# Altium PCB PCB_上底板.pcbdoc
Units mil, origin at the board's own origin, x right, y up, seen from the top; angles counter-clockwise.
Board outline 3872.5 x 2860 mil, 2 copper layers (Top Layer, Bottom Layer); 3 components, 88 nets, 97 pads, 0 vias.
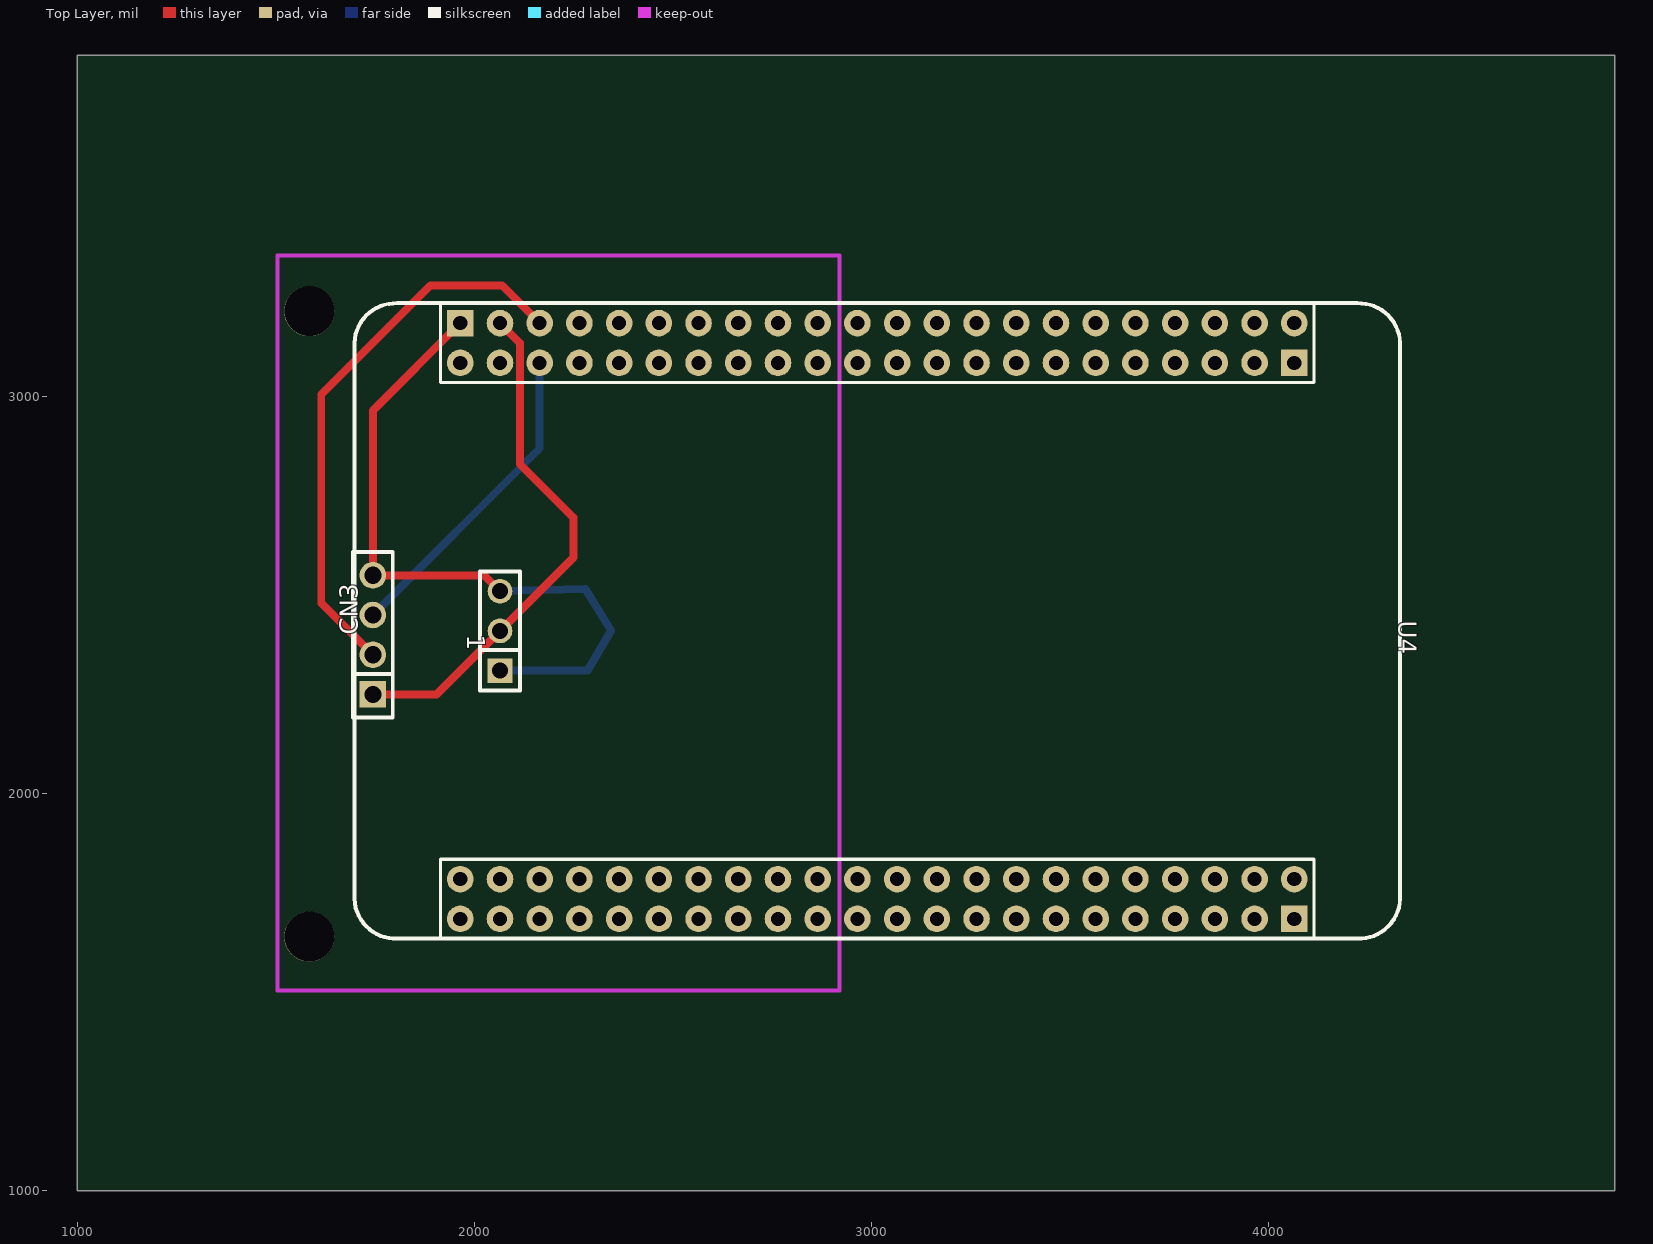
[diagram p0: Top Layer view]
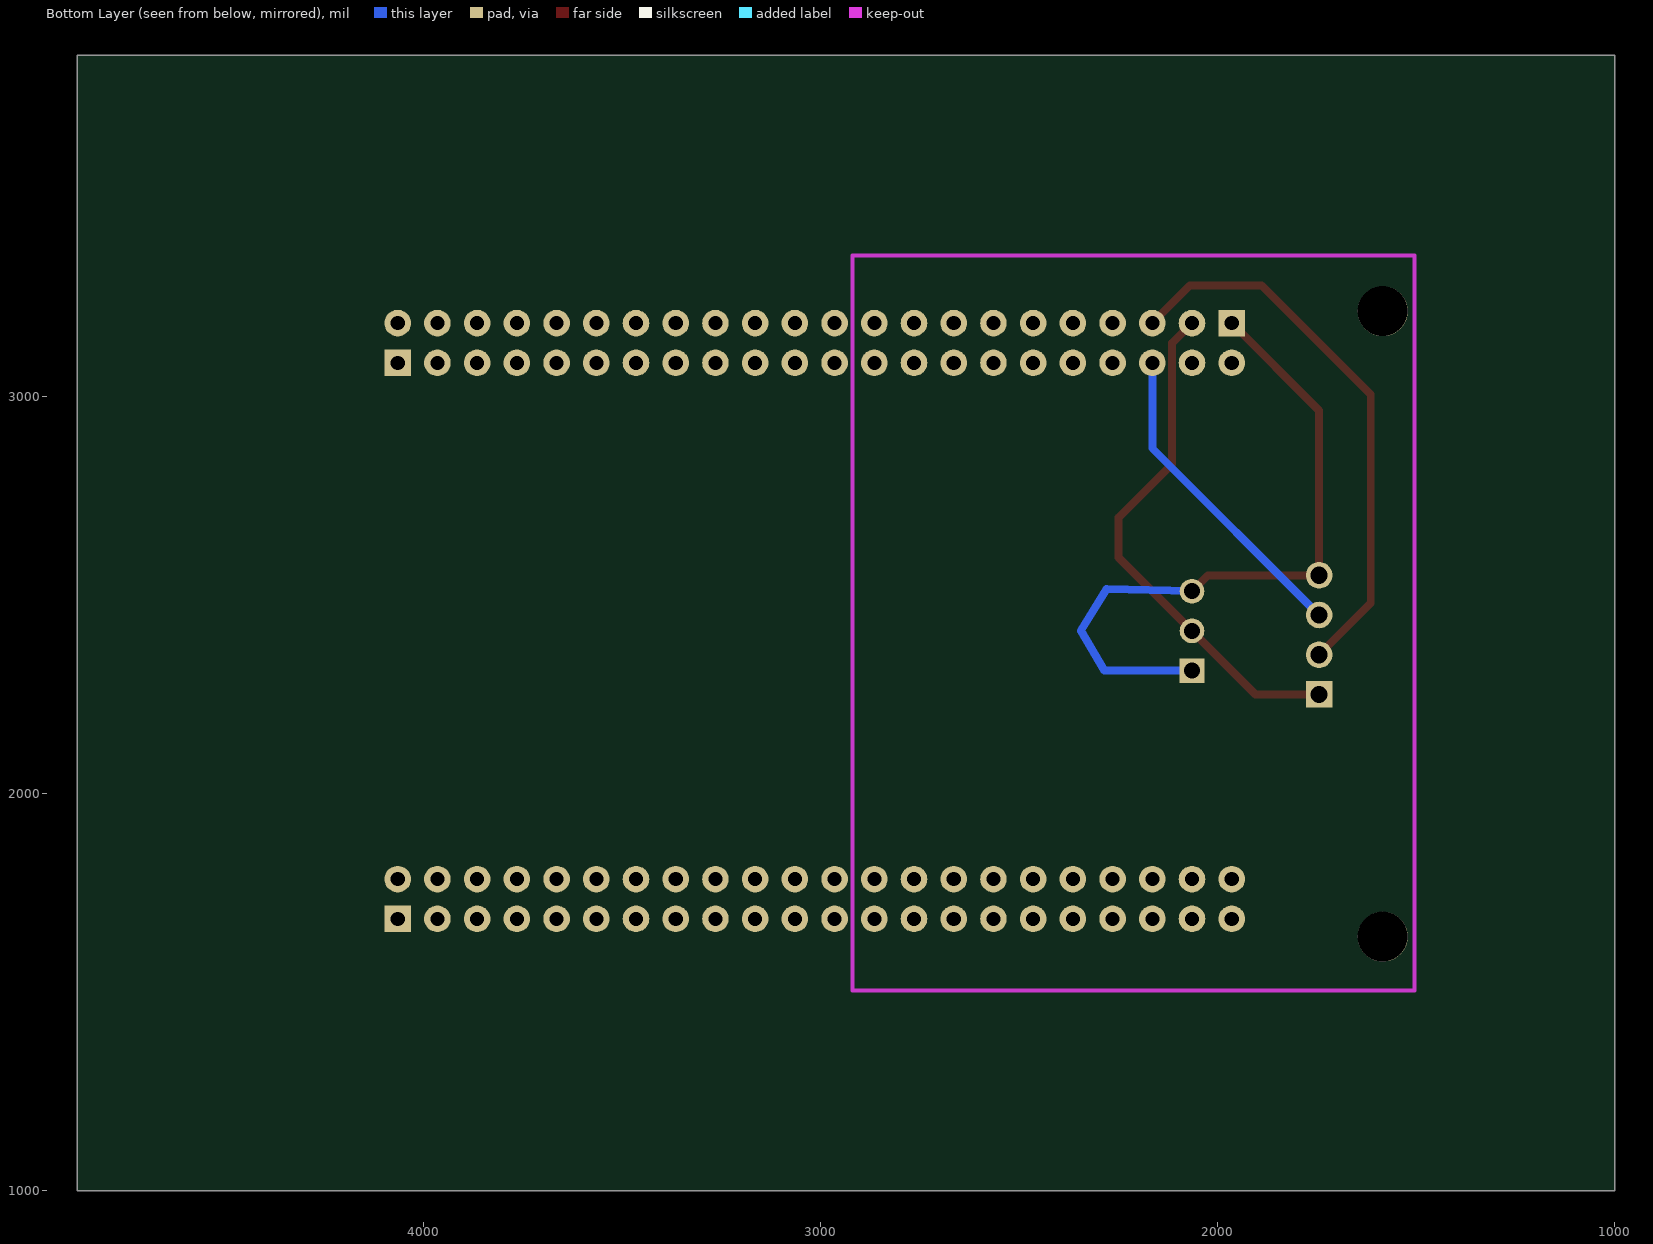
[diagram p1: Bottom Layer view, seen from below]

## Layer stack, top to bottom
Top Layer: signal copper (thickness not stored)
Dielectric: dielectric 12.6, FR-4, Dk 4.8
Bottom Layer: signal copper (thickness not stored)

## Board outline
4872.5,1000 1000,1000 1000,3860 4872.5,3860

## Components (designator, comment, footprint, x,y, rotation, side; value= is the part's Value field where it differs from the comment)
1 "照明灯" HDR-TH_3P-P2.54-V-F 2065,2410 r90 top
CN3 "openmv接口" HDR-TH_4P-P2.54-V-F 1745,2400 r90 top
U4 "Openmv" STM32H7XX_WEACT_COREBOARD 3020,2395 r270 top

## Footprints (in the part's own frame and the unit in brackets; to place one, negate y for a bottom-side part, rotate by r counter-clockwise, add the part's x,y. Pads: shape width x height; smd on the part's side, far side on the other; paste and mask are expansions set on the pad)
HDR-TH_3P-P2.54-V-F [mil]
  rect 62x62 hole 40.16: 1(-100,0)
  round 62 hole 40.16: 2(0,0) 3(100,0)
  silkscreen extent -150,-50 150,50
HDR-TH_4P-P2.54-V-F [mm]
  rect 1.7x1.7 hole 1.1: 1(-3.81,0)
  round 1.7 hole 1.1: 2(-1.27,0) 3(1.27,0) 4(3.81,0)
  silkscreen extent -5.29,-1.27 5.29,1.27
STM32H7XX_WEACT_COREBOARD [mil]
  round 66.93 hole 35.43: 1(-790,1045) 3(-790,945) 4(-690,945) 5(-790,845) 6(-690,845) 7(-790,745) 8(-690,745) 9(-790,645) 10(-690,645) 11(-790,545) 12(-690,545) 13(-790,445) 14(-690,445) 15(-790,345) 16(-690,345) 17(-790,245) 18(-690,245) 19(-790,145) 20(-690,145) 21(-790,45) 22(-690,45) 23(-790,-55) 24(-690,-55) 25(-790,-155) 26(-690,-155) 27(-790,-255) 28(-690,-255) 29(-790,-355) 30(-690,-355) 31(-790,-455) 32(-690,-455) 33(-790,-555) 34(-690,-555) 35(-790,-655) 36(-690,-655) 37(-790,-755) 38(-690,-755) 39(-790,-855) 40(-690,-855) 41(-790,-955) 42(-690,-955) 44(-690,-1055) 45(610,-1055) 46(710,-1055) 47(610,-955) 48(710,-955) 49(610,-855) 50(710,-855) 51(610,-755) 52(710,-755) 53(610,-655) 54(710,-655) 55(610,-555) 56(710,-555) 57(610,-455) 58(710,-455) 59(610,-355) 60(710,-355) 61(610,-255) 62(710,-255) 63(610,-155) 64(710,-155) 65(610,-55) 66(710,-55) 67(610,45) 68(710,45) 69(610,145) 70(710,145) 71(610,245) 72(710,245) 73(610,345) 74(710,345) 75(610,445) 76(710,445) 77(610,545) 78(710,545) 79(610,645) 80(710,645) 81(610,745) 82(710,745) 83(610,845) 84(710,845) 85(610,945) 86(710,945) 87(610,1045)
  rect 66.93x66.93 hole 35.43: 2(-690,1045) 43(-790,-1055) 88(710,1045)
  silkscreen extent -840,-1322 760,1312

## Free pads (board coordinates)
  round 125.98 hole 125.98 unplated: ""(1585,1640) ""(1585,3215)

## Nets (pads, with @x,y where several pads share a name; then routed paths per layer and width w, separated by ;. In a path a pad name is that pad's centre, name@x,y a point inside that pad or via, vN(x,y) a via of type N, cw(c..) or ccw(c..) an arc to the next point about the centre after c; other vN are vias at no path point)
+5V: 1.2 CN3.1 U4.41 | length 1314.5
  Top Layer w20: CN3.1 1905,2250 1.2 2250,2595 2250,2695 2115,2830 2115,3135 U4.41
GND: 1.1 1.3 CN3.4 U4.43 | length 1737.9
  Top Layer w20: U4.43 1745,2965 CN3.4 2025,2550 1.3
  Bottom Layer w20: 1.1 2285,2310 2345,2410 2280,2515 1.3
RX2: CN3.3 U4.40 | length 809
  Bottom Layer w20: CN3.3 2165,2870 U4.40
TX2: CN3.2 U4.39 | length 1412.1
  Top Layer w20: CN3.2 1615,2480 1615,3005 1890,3280 2070,3280 U4.39
U4_1: U4.1
U4_2: U4.2
U4_3: U4.3
U4_4: U4.4
U4_5: U4.5
U4_6: U4.6
U4_7: U4.7
U4_8: U4.8
U4_9: U4.9
U4_10: U4.10
U4_11: U4.11
U4_12: U4.12
U4_13: U4.13
U4_14: U4.14
U4_15: U4.15
U4_16: U4.16
U4_17: U4.17
U4_18: U4.18
U4_19: U4.19
U4_20: U4.20
U4_21: U4.21
U4_22: U4.22
U4_23: U4.23
U4_24: U4.24
U4_25: U4.25
U4_26: U4.26
U4_27: U4.27
U4_28: U4.28
U4_29: U4.29
U4_30: U4.30
U4_31: U4.31
U4_32: U4.32
U4_33: U4.33
U4_34: U4.34
U4_35: U4.35
U4_36: U4.36
U4_37: U4.37
U4_38: U4.38
U4_42: U4.42
U4_44: U4.44
U4_45: U4.45
U4_46: U4.46
U4_47: U4.47
U4_48: U4.48
U4_49: U4.49
U4_50: U4.50
U4_51: U4.51
U4_52: U4.52
U4_53: U4.53
U4_54: U4.54
U4_55: U4.55
U4_56: U4.56
U4_57: U4.57
U4_58: U4.58
U4_59: U4.59
U4_60: U4.60
U4_61: U4.61
U4_62: U4.62
U4_63: U4.63
U4_64: U4.64
U4_65: U4.65
U4_66: U4.66
U4_67: U4.67
U4_68: U4.68
U4_69: U4.69
U4_70: U4.70
U4_71: U4.71
U4_72: U4.72
U4_73: U4.73
U4_74: U4.74
U4_75: U4.75
U4_76: U4.76
U4_77: U4.77
U4_78: U4.78
U4_79: U4.79
U4_80: U4.80
U4_81: U4.81
U4_82: U4.82
U4_83: U4.83
U4_84: U4.84
U4_85: U4.85
U4_86: U4.86
U4_87: U4.87
U4_88: U4.88

## Silkscreen, mask and mechanical layers (free items; w line width, h text height)
Document:
  lines w0.1: 2936.24,2429.99 2936.26,2430.01